# EAGLE board JLC_PCB_7_19 (EAGLE 9.6.2)
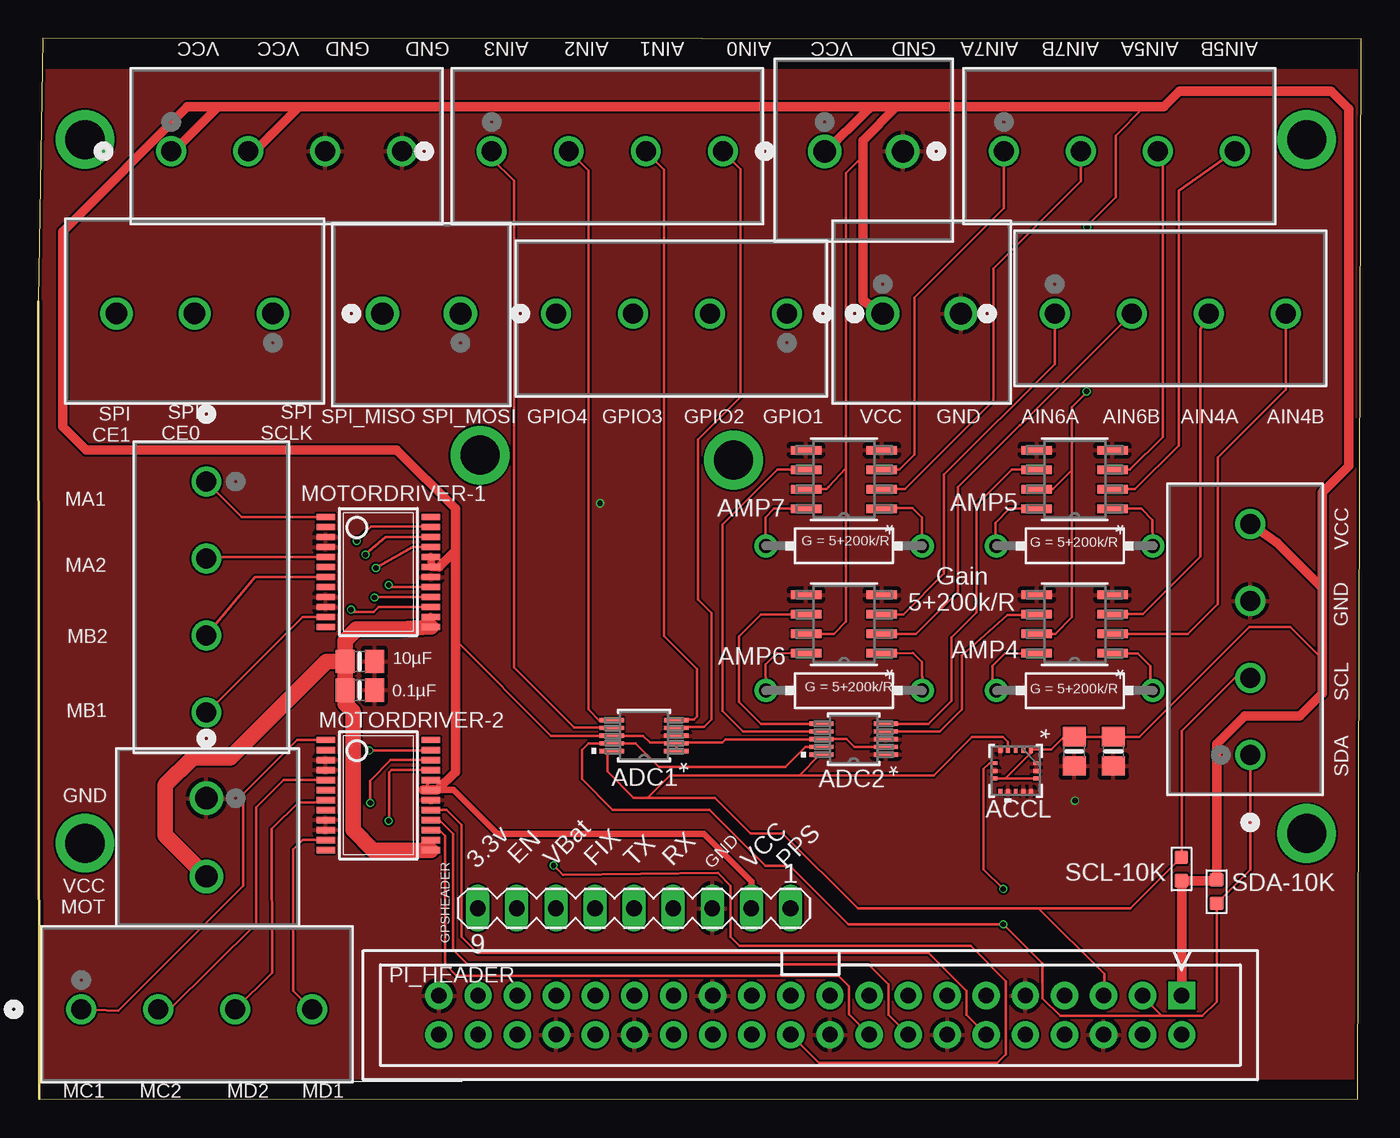
[diagram p0: board, top side]
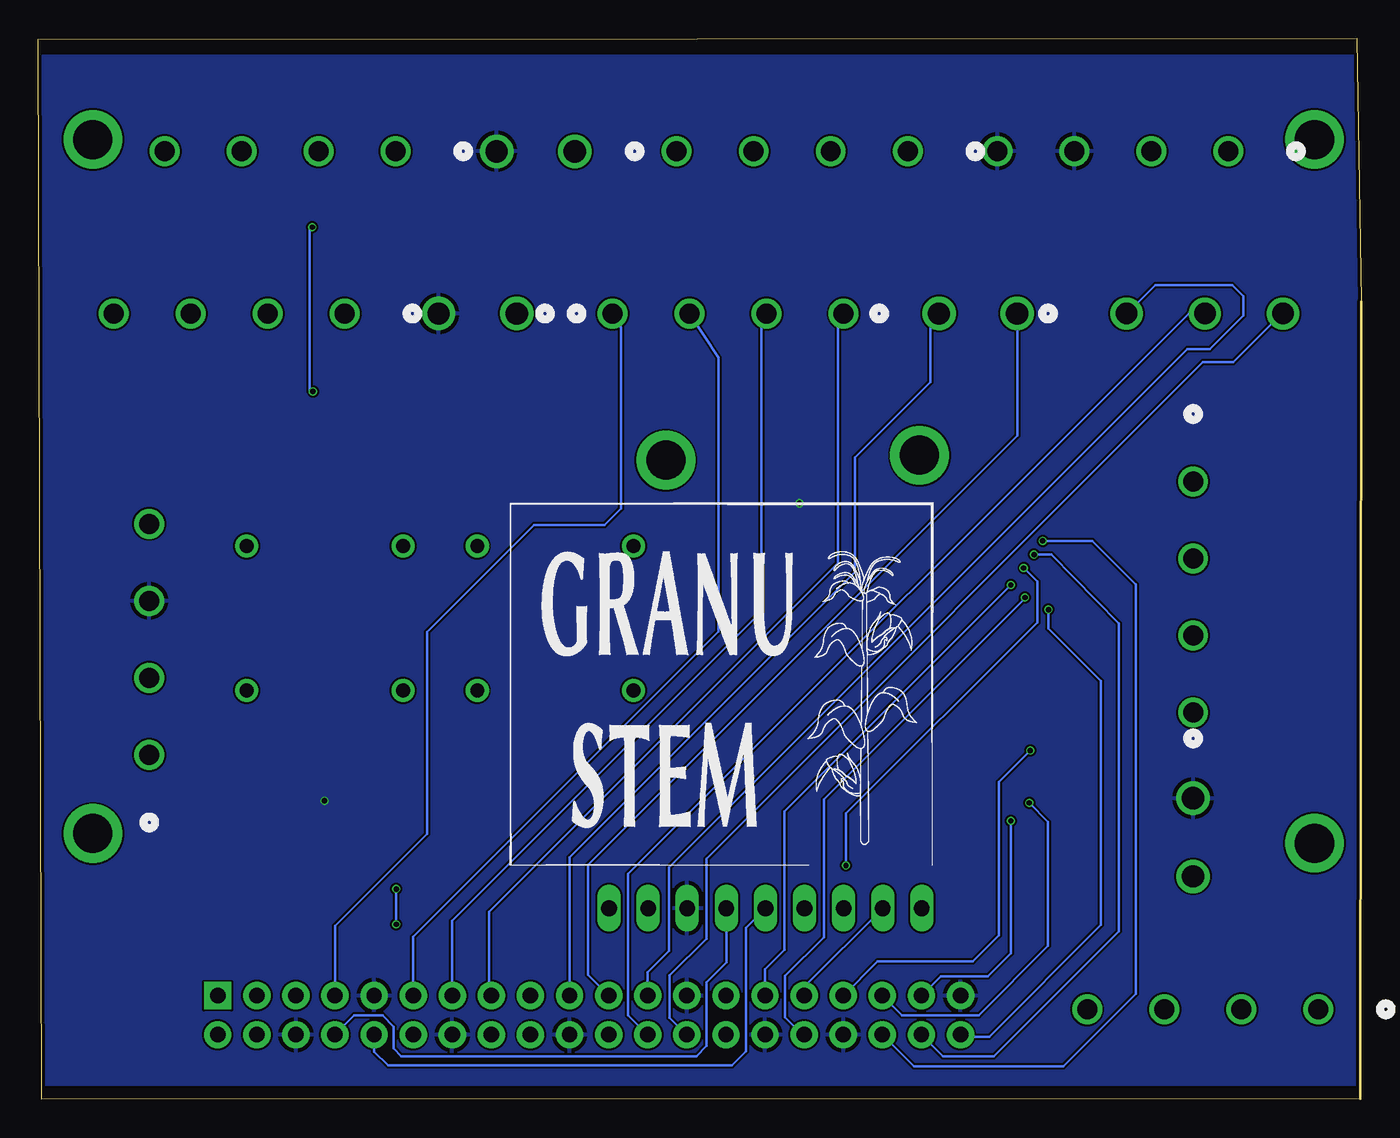
[diagram p1: board, bottom side, seen from below]

Size 85.93 x 68.94 mm. Coordinates in mm from the lower left corner, seen from the top.
Outline: 0.05,0.04 85.73,0 85.93,68.87 0.27,68.94 0,51.84 0.05,0.04
Copper layers (1*16): Top 0.035559375mm / dielectric 1.6mm / Bottom 0.035559375mm
Design rules "JCLPCB DRC": minimum track width 5mil, minimum drill 12mil, track to track 5mil, track to pad 5mil, pad to pad 5mil, via to via 5mil, smd to smd 5mil, copper to edge 8mil, drill to drill 6mil, minimum pad ring 5mil, minimum via ring 3mil, stop-mask expansion 2.5mil, vias tented up to drill 0mil, thermal gap 10mil

## Footprints (pad centres in the part's own frame; a part is rotated, then mirrored left to right if it is on the bottom)
LGA-16_3X3X1MM = smd 0.356 x 0.254: 1 -1.346,1; 2 -1.346,0.5; 3 -1.346,0; 4 -1.346,-0.5; 5 -1.346,-1; 9 1.346,-1; 10 1.346,-0.5; 11 1.346,0; 12 1.346,0.5; 13 1.346,1 | smd 0.254 x 0.356: 6 -0.5,-1.346; 7 0,-1.346; 8 0.5,-1.346; 14 0.5,1.346; 15 0,1.346; 16 -0.5,1.346
DGS10 = smd 1.575 x 0.279: 1 -2.095,1; 2 -2.095,0.5; 3 -2.095,0; 4 -2.095,-0.5; 5 -2.095,-1; 6 2.095,-1; 7 2.095,-0.5; 8 2.095,0; 9 2.095,0.5; 10 2.095,1
R_8_ADI = smd 1.981 x 0.559: 1 -2.464,1.905; 2 -2.464,0.635; 3 -2.464,-0.635; 4 -2.464,-1.905; 5 2.464,-1.905; 6 2.464,-0.635; 7 2.464,0.635; 8 2.464,1.905
CONN_1715048_PXC = drill 1.295 pad 1.803: 1 0,0; 2 5.004,0; 3 10.008,0; 4 15.011,0
CONN02_1730612_11P34X11P62_PXC = drill 1.448 pad 1.956: 1 0,0; 2 5.08,0
CONN_1730405_PXC = drill 1.397 pad 1.905: 1 0,0; 2 5.08,0; 3 10.16,0
MA09-1 = drill 1.016 long: 1 -10.16,0; 2 -7.62,0; 3 -5.08,0; 4 -2.54,0; 5 0,0; 6 2.54,0; 7 5.08,0; 8 7.62,0; 9 10.16,0
SSOP24 = smd 0.4 x 1.2: 1 -3.575,-3.42; 2 -2.925,-3.42; 3 -2.275,-3.42; 4 -1.625,-3.42; 5 -0.975,-3.42; 6 -0.325,-3.42; 7 0.325,-3.42; 8 0.975,-3.42; 9 1.625,-3.42; 10 2.275,-3.42; 11 2.925,-3.42; 12 3.575,-3.42; 13 3.575,3.42; 14 2.925,3.42; 15 2.275,3.42; 16 1.625,3.42; 17 0.975,3.42; 18 0.325,3.42; 19 -0.325,3.42; 20 -0.975,3.42; 21 -1.625,3.42; 22 -2.275,3.42; 23 -2.925,3.42; 24 -3.575,3.42
RASPI_GPIO_B+_BOX = drill 1 pad 1.778 square: 1 -24.13,-1.27 | drill 1 pad 1.778: 2 -24.13,1.27; 3 -21.59,-1.27; 4 -21.59,1.27; 5 -19.05,-1.27; 6 -19.05,1.27; 7 -16.51,-1.27; 8 -16.51,1.27; 9 -13.97,-1.27; 10 -13.97,1.27; 11 -11.43,-1.27; 12 -11.43,1.27; 13 -8.89,-1.27; 14 -8.89,1.27; 15 -6.35,-1.27; 16 -6.35,1.27; 17 -3.81,-1.27; 18 -3.81,1.27; 19 -1.27,-1.27; 20 -1.27,1.27; 21 1.27,-1.27; 22 1.27,1.27; 23 3.81,-1.27; 24 3.81,1.27; 25 6.35,-1.27; 26 6.35,1.27; 27 8.89,-1.27; 28 8.89,1.27; 29 11.43,-1.27; 30 11.43,1.27; 31 13.97,-1.27; 32 13.97,1.27; 33 16.51,-1.27; 34 16.51,1.27; 35 19.05,-1.27; 36 19.05,1.27; 37 21.59,-1.27; 38 21.59,1.27; 39 24.13,-1.27; 40 24.13,1.27
HPS58 = drill 0.9 pad 1.5: 1 -5.08,0; 2 5.08,0
R0603 = smd 0.889 x 0.889: 1 0,0.762; 2 0,-0.762
0805-NO = smd 1.24 x 1.5: 1 -0.95,0; 2 0.95,0

## Placement (x,y rotation side)
ACCL  LIS3DHTR  [LGA-16_3X3X1MM]  63.49,21.35 270 top
ADC1  ADS1115IDGSR  [DGS10]  39.34,23.63 180 top
ADC2  ADS1115IDGSR  [DGS10]  52.97,23.41 180 top
ADC2_AIN4_AMP  AD627ARZ-R7  [R_8_ADI]  67.32,30.89 180 top
ADC2_AIN5_AMP  AD627ARZ-R7  [R_8_ADI]  67.32,40.28 180 top
ADC2_AIN6_AMP  AD627ARZ-R7  [R_8_ADI]  52.34,30.89 180 top
ADC2_AIN7_AMP  AD627ARZ-R7  [R_8_ADI]  52.34,40.28 180 top
ADC_1A_PWR  1715048  [CONN_1715048_PXC]  8.62,61.61 0 top
ADC_1A_SIG  1715048  [CONN_1715048_PXC]  29.45,61.61 0 top
ADC_2A_PWR  1730612  [CONN02_1730612_11P34X11P62_PXC]  51.08,61.61 0 top
ADC_2A_SIG  1715048  [CONN_1715048_PXC]  62.73,61.61 0 top
ADC_2B_PWR  1730612  [CONN02_1730612_11P34X11P62_PXC]  54.85,51.07 0 top
ADC_2B_SIG  1715048  [CONN_1715048_PXC]  66.03,51.07 0 top
GPIO_A_  1715048  [CONN_1715048_PXC]  48.63,51.07 180 top
GPIO_SPIA1  1730612  [CONN02_1730612_11P34X11P62_PXC]  27.42,51.07 180 top
GPIO_SPIA2  1730405  [CONN_1730405_PXC]  15.23,51.07 180 top
GPSHEADER  [MA09-1]  38.7,12.42 180 top
I2CA_  1715048  [CONN_1715048_PXC]  78.73,22.39 90 top
MOTOR_1_A  1715048  [CONN_1715048_PXC]  10.91,40.14 270 top
MOTOR_1_B  1730612  [CONN02_1730612_11P34X11P62_PXC]  10.91,19.57 270 top
MOTOR_2_  1715048  [CONN_1715048_PXC]  2.78,5.85 0 top
MOTORDRIVER-1  TB6612 SSOP  [SSOP24]  22.09,34.28 270 top
MOTORDRIVER-2  TB6612 SSOP  [SSOP24]  22.09,19.77 270 top
PI_HEADER  RASPI_GPIO_B+#_BOX  [RASPI_GPIO_B+_BOX]  50.15,5.47 180 top
R5  [HPS58]  52.34,26.57 180 top
R6  [HPS58]  52.34,35.97 180 top
R7  [HPS58]  67.32,26.57 180 top
R8  [HPS58]  67.32,35.97 180 top
SCL-10K  10K 1/10W  [R0603]  74.26,14.97 0 top
SDA-10K  10K 1/10W  [R0603]  76.54,13.5 180 top
VCC_10UF  10µF  [0805-NO]  69.84,22.62 270 top
VCC_.1UF  0.1µF  [0805-NO]  67.3,22.62 270 top
VMOTOR_10UF  10µF  [0805-NO]  20.88,28.46 0 top
VMOTOR_.1UF  0.1µF  [0805-NO]  20.88,26.59 0 top

## Library data of the parts
ACCL = Capstone; MANUFACTURER_PART_NUMBER: LIS3DHTR; VENDOR: STMicroelectronics
ADC1 ADC2 = Capstone; MANUFACTURER_PART_NUMBER: ADS1115IDGSR; VENDOR: Texas Instruments
ADC2_AIN4_AMP ADC2_AIN5_AMP ADC2_AIN6_AMP ADC2_AIN7_AMP = Amplifier; COPYRIGHT: Copyright (C) 2023 Ultra Librarian. All rights reserved.; DIGIKEY_PART_NUMBER_1: AD627ARZ-R7CT-ND; DIGIKEY_PART_NUMBER_2: AD627ARZ-R7DKR-ND; DIGIKEY_PART_NUMBER_3: AD627ARZ-R7TR-ND; MANUFACTURER_PART_NUMBER: AD627ARZ-R7; MFR_NAME: Analog Devices Inc
ADC_1A_PWR ADC_1A_SIG ADC_2A_SIG ADC_2B_SIG GPIO_A_ I2CA_ MOTOR_1_A MOTOR_2_ = ScrewTerminals; COPYRIGHT: Copyright (C) 2023 Ultra Librarian. All rights reserved.; MANUFACTURER_PART_NUMBER: 1715048; MFR_NAME: Phoenix Contact
ADC_2A_PWR ADC_2B_PWR GPIO_SPIA1 MOTOR_1_B = ScrewTerminals; COPYRIGHT: Copyright (C) 2023 Ultra Librarian. All rights reserved.; MANUFACTURER_PART_NUMBER: 1730612; MFR_NAME: Phoenix Contact
GPIO_SPIA2 = ScrewTerminals; COPYRIGHT: Copyright (C) 2023 Ultra Librarian. All rights reserved.; MANUFACTURER_PART_NUMBER: 1730405; MFR_NAME: Phoenix Contact
GPSHEADER = con-lstb; OC_FARNELL: unknown; OC_NEWARK: unknown
MOTORDRIVER-1 MOTORDRIVER-2 VCC_10UF VCC_.1UF VMOTOR_10UF VMOTOR_.1UF = microbuilder
PI_HEADER = raspberrypi_bastelstube_v13
R5-R8 = resistor-power; OC_FARNELL: unknown; OC_NEWARK: unknown
SCL-10K SDA-10K = Seeed-Resistor; MPN: RC0603JR-0710KL

## Nets
3V3B: PI_HEADER.17
5V0A: PI_HEADER.2
5V0B: PI_HEADER.4
ADC1_AIN0: ADC1.4 ADC_1A_SIG.4
ADC1_AIN1: ADC1.5 ADC_1A_SIG.3
ADC1_AIN2: ADC1.6 ADC_1A_SIG.2
ADC1_AIN3: ADC1.7 ADC_1A_SIG.1
ADC2_AIN4: ADC2.4 ADC2_AIN4_AMP.6
ADC2_AIN4A: ADC2_AIN4_AMP.3 ADC_2B_SIG.3
ADC2_AIN4B: ADC2_AIN4_AMP.2 ADC_2B_SIG.4
ADC2_AIN5: ADC2.5 ADC2_AIN5_AMP.6
ADC2_AIN5A: ADC2_AIN5_AMP.3 ADC_2A_SIG.3
ADC2_AIN5B: ADC2_AIN5_AMP.2 ADC_2A_SIG.4
ADC2_AIN6: ADC2.6 ADC2_AIN6_AMP.6
ADC2_AIN6A: ADC2_AIN6_AMP.3 ADC_2B_SIG.1
ADC2_AIN6B: ADC2_AIN6_AMP.2 ADC_2B_SIG.2
ADC2_AIN7: ADC2.7 ADC2_AIN7_AMP.6
ADC2_AIN7A: ADC2_AIN7_AMP.3 ADC_2A_SIG.1
ADC2_AIN7B: ADC2_AIN7_AMP.2 ADC_2A_SIG.2
ADC_1: GPIO_SPIA1.1 PI_HEADER.19
AIN1: MOTORDRIVER-1.21 PI_HEADER.22
AIN2: MOTORDRIVER-1.22 PI_HEADER.38
BIN1: MOTORDRIVER-1.17 PI_HEADER.29
BIN2: MOTORDRIVER-1.16 PI_HEADER.32
CIN1: MOTORDRIVER-2.21 PI_HEADER.37
CIN2: MOTORDRIVER-2.22 PI_HEADER.35
DIN1: MOTORDRIVER-2.17 PI_HEADER.12
DIN2: MOTORDRIVER-2.16 PI_HEADER.16
EN: GPSHEADER.8 PI_HEADER.31
FIX: GPSHEADER.6
GND: ACCL.5 ACCL.7 ACCL.10 ACCL.12 ACCL.13 ACCL.15 ACCL.16 ADC1.3 ADC2.1 ADC2.3 ADC2_AIN4_AMP.4 ADC2_AIN4_AMP.5 ADC2_AIN5_AMP.4 ADC2_AIN5_AMP.5 ADC2_AIN6_AMP.4 ADC2_AIN6_AMP.5 ADC2_AIN7_AMP.4 ADC2_AIN7_AMP.5 ADC_1A_PWR.3 ADC_1A_PWR.4 ADC_2A_PWR.2 ADC_2B_PWR.2 GPSHEADER.3 I2CA_.3 MOTOR_1_B.1 MOTORDRIVER-1.3 MOTORDRIVER-1.4 MOTORDRIVER-1.9 MOTORDRIVER-1.10 MOTORDRIVER-1.18 MOTORDRIVER-2.3 MOTORDRIVER-2.4 MOTORDRIVER-2.9 MOTORDRIVER-2.10 MOTORDRIVER-2.18 PI_HEADER.6 PI_HEADER.9 PI_HEADER.14 PI_HEADER.20 PI_HEADER.25 PI_HEADER.30 PI_HEADER.34 PI_HEADER.39 VCC_10UF.2 VCC_.1UF.2 VMOTOR_10UF.2 VMOTOR_.1UF.2
GPIO1: GPIO_A_.1 PI_HEADER.7
GPIO2: GPIO_A_.2 PI_HEADER.11
GPIO3: GPIO_A_.3 PI_HEADER.13
GPIO4: GPIO_A_.4 PI_HEADER.15
M1_MV: MOTORDRIVER-1.24
M2_MV: MOTORDRIVER-2.24
MA1: MOTOR_1_A.1 MOTORDRIVER-1.1
MA2: MOTOR_1_A.2 MOTORDRIVER-1.5
MB1: MOTOR_1_A.4 MOTORDRIVER-1.11
MB2: MOTOR_1_A.3 MOTORDRIVER-1.7
MC1: MOTOR_2_.1 MOTORDRIVER-2.1
MC2: MOTOR_2_.2 MOTORDRIVER-2.5
MD1: MOTOR_2_.4 MOTORDRIVER-2.11
MD2: MOTOR_2_.3 MOTORDRIVER-2.7
N$15: ADC2_AIN6_AMP.1 R5.1
N$16: ADC2_AIN6_AMP.8 R5.2
N$17: ADC2_AIN4_AMP.1 R7.1
N$18: ADC2_AIN4_AMP.8 R7.2
N$19: ADC2_AIN5_AMP.1 R8.1
N$20: ADC2_AIN5_AMP.8 R8.2
N$21: ADC2_AIN7_AMP.1 R6.1
N$22: ADC2_AIN7_AMP.8 R6.2
PWMA: MOTORDRIVER-1.23 PI_HEADER.36
PWMB: MOTORDRIVER-1.15 PI_HEADER.40
PWMC: MOTORDRIVER-2.23 PI_HEADER.33
PWMD: MOTORDRIVER-2.15 PI_HEADER.18
RX: GPSHEADER.4 PI_HEADER.8
SCL: ACCL.4 ADC1.10 ADC2.10 I2CA_.2 PI_HEADER.5 SCL-10K.1
SDA: ACCL.6 ADC1.9 ADC2.9 I2CA_.1 PI_HEADER.3 SDA-10K.1
SPI_CE0: GPIO_SPIA2.2 PI_HEADER.24
SPI_CE1: GPIO_SPIA2.3 PI_HEADER.26
SPI_MISO: GPIO_SPIA1.2 PI_HEADER.21
SPI_SCLK: GPIO_SPIA2.1 PI_HEADER.23
TX: GPSHEADER.5 PI_HEADER.10
VCC: ACCL.1 ACCL.8 ACCL.14 ADC1.1 ADC1.2 ADC1.8 ADC2.2 ADC2.8 ADC2_AIN4_AMP.7 ADC2_AIN5_AMP.7 ADC2_AIN6_AMP.7 ADC2_AIN7_AMP.7 ADC_1A_PWR.1 ADC_1A_PWR.2 ADC_2A_PWR.1 ADC_2B_PWR.1 GPSHEADER.2 I2CA_.4 MOTORDRIVER-1.19 MOTORDRIVER-1.20 MOTORDRIVER-2.19 MOTORDRIVER-2.20 PI_HEADER.1 SCL-10K.2 SDA-10K.2 VCC_10UF.1 VCC_.1UF.1
VMOTOR: MOTOR_1_B.2 MOTORDRIVER-1.13 MOTORDRIVER-1.14 MOTORDRIVER-2.13 MOTORDRIVER-2.14 VMOTOR_10UF.1 VMOTOR_.1UF.1

## Tracks (layer width: path | path; a pad name or v marks a point on that pad's centre or on a via)
ADC1_AIN0
  Top 0.152: ADC1.4 41.5,24.19 43.24,24.19 43.73,24.69 43.73,31.62 42.85,32.5 42.85,42.86 45.61,45.62 45.61,60.46 ADC_1A_SIG.4
ADC1_AIN1
  Top 0.152: ADC1.5 41.5,24.7 42.59,24.7 42.78,24.89 42.78,27.98 40.65,30.1 40.65,60.41 ADC_1A_SIG.3
ADC1_AIN2
  Top 0.152: ADC1.6 36.44,24.63 35.73,25.35 35.73,60.34 ADC_1A_SIG.2
ADC1_AIN3
  Top 0.152: ADC1.7 37.21,24.18 34.79,24.18 30.9,28.07 30.9,59.69 29.45,61.14 ADC_1A_SIG.1
ADC2_AIN4
  Top 0.152: ADC2.4 55.08,23.92 58.55,23.92 59.98,25.35 59.98,28.83 62.95,31.48 64.27,31.48 ADC2_AIN4_AMP.6
ADC2_AIN4A
  Top 0.152: ADC2_AIN4_AMP.3 69.85,31.53 71.76,31.53 75.5,35.28 75.5,50.05 ADC_2B_SIG.3
ADC2_AIN4B
  Top 0.152: ADC2_AIN4_AMP.2 74.69,30.25 76.62,32.18 76.62,41.72 81.04,46.14 ADC_2B_SIG.4
ADC2_AIN5
  Top 0.152: ADC2.5 57.83,24.41 59.31,25.88 59.31,30.02 60.93,31.65 60.93,38.62 63.26,40.94 64.83,40.94 ADC2_AIN5_AMP.6
ADC2_AIN5A
  Top 0.152: ADC2_AIN5_AMP.3 70.9,40.92 73.04,43.05 73.04,61.3 ADC_2A_SIG.3
ADC2_AIN5B
  Top 0.152: ADC2_AIN5_AMP.2 71.25,39.65 74.08,42.48 74.08,59.04 ADC_2A_SIG.4
ADC2_AIN6
  Top 0.152: ADC2_AIN6_AMP.6 46.95,31.52 45.52,30.09 45.52,25.83 46.94,24.41 ADC2.6
ADC2_AIN6A
  Top 0.152: ADC_2B_SIG.1 66.03,47.79 58.83,40.59 58.83,34.16 56.18,31.52 ADC2_AIN6_AMP.3
ADC2_AIN6B
  Top 0.152: ADC_2B_SIG.2 63.79,43.83 63.77,43.83 59.73,39.79 59.73,32.97 57.01,30.25 ADC2_AIN6_AMP.2
ADC2_AIN7
  Top 0.152: ADC2.7 45.78,23.91 44.44,25.25 44.44,37.35 48.01,40.92 ADC2_AIN7_AMP.6
ADC2_AIN7A
  Top 0.152: ADC_2A_SIG.1 62.73,57.91 56.91,52.1 56.91,41.9 55.93,40.92 ADC2_AIN7_AMP.3
ADC2_AIN7B
  Top 0.152: ADC_2A_SIG.2 67.73,59.68 62.04,53.99 62.04,45.4 56.29,39.65 ADC2_AIN7_AMP.2
ADC_1
  Bottom 0.152: PI_HEADER.19 51.42,15.73 32.87,34.28 32.87,41.72 27.97,46.62 27.97,50.54 27.95,50.54 GPIO_SPIA1.1
AIN1  (via drill 0.35)
  Top 0.152: MOTORDRIVER-1.21 24.31,35.9 v21.92,34.53 | PI_HEADER.22 50.71,2.37 62.29,2.37 62.87,2.95 62.87,7.67 60.57,9.97 45.56,9.97 44.97,10.56 44.97,13.88 44.14,14.71 34.09,14.58 v33.46,15.2
  Bottom 0.152: v33.46,15.2 33.45,15.21 33.45,18.58 21.03,31 21.03,33.64 v21.92,34.53
AIN2  (via drill 0.35)
  Top 0.152: MOTORDRIVER-1.22 22.57,36.55 21.26,35.45 v21.25,35.39
  Bottom 0.152: v21.25,35.39 20.11,35.39 15.74,30.93 15.74,10.92 23.84,2.82 27.18,2.82 PI_HEADER.38
BIN1  (via drill 0.35)
  Top 0.152: MOTORDRIVER-1.17 22.84,33.3 v22.75,33.43
  Bottom 0.152: PI_HEADER.29 38.72,8.46 37.45,9.73 37.45,18.72 v22.75,33.43
BIN2  (via drill 0.35)
  Top 0.152: MOTORDRIVER-1.16 22.06,32.65 22.02,32.61 v21.83,32.61
  Bottom 0.152: PI_HEADER.32 36.29,4.2 37.41,5.33 37.41,8.03 34.9,10.55 34.9,19.49 21.83,32.56 v21.83,32.61
CIN1  (via drill 0.35)
  Top 0.152: MOTORDRIVER-2.21 22.94,21.4 22.78,21.24 22.78,18.14 v22.75,18.1
  Bottom 0.152: v22.75,18.1 22.75,9.49 24.24,8 27.31,8 PI_HEADER.37
CIN2  (via drill 0.35)
  Top 0.152: MOTORDRIVER-2.22 22.89,22.05 21.55,20.71 v21.55,19.27
  Bottom 0.152: PI_HEADER.35 29.83,5.47 24.83,5.47 20.33,9.97 20.33,18.05 v21.55,19.27
DIN1
  Top 0.152: MOTORDRIVER-2.17 26.53,18.8 27.48,17.85 27.48,10.58 28.52,9.54 57.83,9.54 60.3,7.07 60.3,5.49 PI_HEADER.12
DIN2
  Top 0.152: MOTORDRIVER-2.16 26.02,18.15 26.93,17.24 26.93,9.71 27.86,8.78 53.91,8.78 55.21,7.47 55.21,5.49 PI_HEADER.16
EN
  Bottom 0.152: PI_HEADER.31 36.18,7.32 GPSHEADER.8
GND  (via drill 0.35)
  other vias: 36.49,38.73 67.35,19.41
  pour Top: 0.28,66.87 85.67,66.87 85.67,1.36 0.28,1.36
  pour Bottom: 0.17,67.81 85.65,67.81 85.65,0.94 0.17,0.94
GPIO1
  Bottom 0.152: PI_HEADER.7 66.66,11.26 60.68,17.25 60.68,30.38 53.75,37.31 49.16,37.31 48.08,38.4 48.08,50.14 GPIO_A_.1
GPIO2
  Bottom 0.152: PI_HEADER.11 61.58,10.55 41.73,30.4 41.73,48.22 GPIO_A_.2
GPIO3
  Bottom 0.152: PI_HEADER.13 59.06,6.76 59.06,11.59 38.94,31.71 38.94,50.75 GPIO_A_.3
GPIO4
  Bottom 0.152: PI_HEADER.15 56.64,6.88 56.64,12.19 33.99,34.85 33.99,50.71 33.95,50.74 GPIO_A_.4
MA1
  Top 0.152: MOTOR_1_A.1 13.21,37.84 17.83,37.84 17.84,37.85 MOTORDRIVER-1.1
MA2
  Top 0.152: MOTOR_1_A.2 10.37,35.25 MOTORDRIVER-1.5
MB1
  Top 0.152: MOTORDRIVER-1.11 17.17,31.35 10.95,25.13 MOTOR_1_A.4
MB2
  Top 0.152: MOTOR_1_A.3 14.08,33.95 MOTORDRIVER-1.7
MC1
  Top 0.152: MOTORDRIVER-2.1 16.81,23.35 13.31,19.85 13.31,13.88 5.18,5.75 2.79,5.84 MOTOR_2_.1
MC2
  Top 0.152: MOTORDRIVER-2.5 15.93,20.75 14.15,18.96 14.15,11.42 8.54,5.85 MOTOR_2_.2
MD1
  Top 0.152: MOTORDRIVER-2.11 17.15,16.85 16.56,16.26 16.56,7.06 MOTOR_2_.4
MD2
  Top 0.152: MOTORDRIVER-2.7 17.97,19.3 16.89,19.3 15.16,17.57 15.17,8.24 MOTOR_2_.3
N$1  (via drill 2.54 pad 3.81)
  other vias: 3.02,62.37
N$2  (via drill 2.54 pad 3.81)
  other vias: 3.02,16.65
N$3  (via drill 2.54 pad 3.81)
  other vias: 82.4,17.28
N$4  (via drill 2.54 pad 3.81)
  other vias: 82.4,62.37
N$5  (via drill 2.54 pad 3.81)
  other vias: 28.69,41.86
N$6  (via drill 2.54 pad 3.81)
  other vias: 45.16,41.54
N$15
  Top 0.152: ADC2_AIN6_AMP.1 56.82,29.01 57.39,28.44 R5.1
N$16
  Top 0.152: ADC2_AIN6_AMP.8 47.97,29.01 47.23,28.27 R5.2
N$17
  Top 0.152: R7.1 72.25,26.24 72.25,28.17 71.44,28.98 ADC2_AIN4_AMP.1
N$18
  Top 0.152: R7.2 61.98,26.35 61.98,28.18 62.78,28.98 ADC2_AIN4_AMP.8
N$19
  Top 0.152: R8.1 72.38,37.66 71.67,38.38 ADC2_AIN5_AMP.1
N$20
  Top 0.152: R8.2 62.18,36.06 62.18,37.46 63.09,38.38 ADC2_AIN5_AMP.8
N$21
  Top 0.152: R6.1 57.39,35.99 57.39,37.82 56.79,38.42 54.84,38.42 ADC2_AIN7_AMP.1
N$22
  Top 0.152: ADC2_AIN7_AMP.8 47.8,38.38 47.23,37.81 47.23,35.99 R6.2
PWMA  (via drill 0.35)
  Top 0.152: MOTORDRIVER-1.23 25.48,37.23 21.61,37.23 v20.68,36.3
  Bottom 0.152: v20.68,36.3 20.66,36.28 17.45,36.28 14.63,33.45 14.63,6.86 19.33,2.16 29.06,2.16 PI_HEADER.36
PWMB  (via drill 0.35)
  Top 0.152: MOTORDRIVER-1.15 22.1,32 21.77,31.67 20.46,31.67 v20.31,31.83
  Bottom 0.152: v20.31,31.83 20.31,30.61 16.9,27.2 16.9,11.33 24.16,4.08 25.9,4.08 PI_HEADER.40
PWMC  (via drill 0.35)
  Top 0.152: MOTORDRIVER-2.23 24.93,22.67 v21.49,22.67
  Bottom 0.152: v21.49,22.67 23.52,20.64 23.52,10.67 25.22,8.98 31.41,8.98 PI_HEADER.33
PWMD
  Top 0.152: MOTORDRIVER-2.15 26.04,17.5 26.42,17.12 26.42,8.8 27.18,8.04 51.97,8.04 52.65,7.36 52.65,5.52 PI_HEADER.18
RX
  Bottom 0.152: GPSHEADER.4 41.24,8.91 42.52,7.63 42.52,3.48 43.18,2.82 62.36,2.82 62.85,3.31 62.85,4.73 63.58,5.46 65.41,5.46 PI_HEADER.8
SCL
  Top 0.152: 64.98,12.41 69.24,8.15 69.24,6.78 PI_HEADER.5 | ADC2.10 50.78,22.41 49.44,21.07 | 64.98,12.41 70.94,12.41 SCL-10K.1 74.28,15.76 74.28,23.95 77.73,27.4 78.68,27.4 78.68,27.39 I2CA_.2 | 64.98,12.41 53.23,12.41 48.35,17.3 46.27,17.3 43.97,19.6 39.6,19.6 | ADC1.10 37.22,22.63 36.97,22.38 36.97,21.3 38.68,19.6 39.6,19.6 | 39.6,19.6 39.6,19.62 41.05,21.07 49.44,21.07 | ACCL.4 62.97,22.71 62.97,23.22 62.65,23.55 60.64,23.55 58.16,21.07 49.44,21.07
SDA  (via drill 0.35)
  Top 0.152: 72.97,5.42 71.74,6.65 PI_HEADER.3 | 72.97,5.42 75.63,5.42 76.54,6.34 SDA-10K.1 78.73,14.92 I2CA_.1 | ADC2.9 49.82,22.91 48.53,21.61 40.31,21.61 38.79,23.13 ADC1.9 35.73,23.13 35.31,22.72 35.31,20.82 37.29,18.83 43.61,18.83 47.25,15.19 48.82,15.19 52.63,11.38 v62.69,11.38 65.24,8.83 65.24,6.59 66.4,5.42 72.97,5.42 | ACCL.6 61.79,21.85 61.41,21.47 61.41,14.96 v62.69,13.68
  Bottom 0.152: v62.69,11.38 v62.69,13.68
SPI_CE0
  Bottom 0.152: PI_HEADER.24 46.37,4.2 47.63,5.46 47.63,14.64 11.2,51.07 GPIO_SPIA2.2
SPI_CE1
  Bottom 0.152: PI_HEADER.26 44.92,5.32 44.92,8.06 42.53,10.44 42.53,15.63 10.27,47.9 8.31,47.9 5.14,51.07 GPIO_SPIA2.3
SPI_MISO
  Bottom 0.152: PI_HEADER.21 48.88,6.75 50.23,8.1 50.23,15.25 22.34,43.14 GPIO_SPIA1.2
SPI_SCLK
  Bottom 0.152: PI_HEADER.23 46.34,8.27 44.95,9.66 44.95,15.07 11.28,48.74 9.83,48.74 7.65,50.93 7.65,52.2 8.37,52.92 13.37,52.92 GPIO_SPIA2.1
TX
  Bottom 0.152: GPSHEADER.5 39.95,11.16 39.95,3.12 40.87,2.21 63.22,2.21 64.12,3.11 PI_HEADER.10
VCC  (via drill 0.35)
  Top 0.152: MOTORDRIVER-2.19 25,20.11 MOTORDRIVER-2.20 | ADC1.1 ADC1.2 | ADC1.2 41.5,23.2 44.44,23.2 44.65,23.41 ADC2.8 52.5,23.41 53,22.91 ADC2.2 | ADC1.2 41.38,23.19 39.73,23.19 39.28,23.63 ADC1.8 33.32,23.63 27.09,29.86 | ACCL.14 ACCL.8 62.82,20.85 64.49,22.52 ACCL.1 64.53,22.73 65.81,22.73 66.66,23.58 67.28,23.58 VCC_.1UF.1 VCC_10UF.1 71.52,23.57 78.66,30.71 81.32,30.71 83.4,28.63 83.4,27.24 | 52.48,41.03 52.48,31.05 51.68,30.25 ADC2_AIN6_AMP.7 | 52.48,41.03 51.32,39.78 51.19,39.65 ADC2_AIN7_AMP.7 | 71.84,64.49 69.99,62.64 69.99,58.62 68.14,56.77 v68.14,56.68 | 67.15,40.9 67.15,44.98 68.1,45.92 v68.1,46 | 67.15,40.9 65.9,39.65 ADC2_AIN5_AMP.7 | 67.15,40.9 67.15,31.33 66.07,30.25 ADC2_AIN4_AMP.7 | 53.56,61.28 52.48,60.2 52.48,41.03
  Top 0.406: MOTORDRIVER-2.19 26.98,20.1 29.83,17.25 43.23,17.25 46.32,14.16 GPSHEADER.2
  Top 0.508: MOTORDRIVER-1.20 MOTORDRIVER-1.19 25.51,34.61 26.03,34.61
  Top 0.61: 55.74,64.49 71.84,64.49 73.1,64.49 74.13,65.52 84,65.52 85.14,64.38 85.14,41.16 83.4,39.42 83.4,33.24 | 11.68,64.49 9.66,64.49 1.57,56.4 1.57,43.73 3.1,42.2 23.28,42.2 27.09,38.38 27.09,35.67 | 55.74,64.49 53.56,62.31 53.56,61.28 53.56,51.89 ADC_2B_PWR.1 | PI_HEADER.1 74.28,14.19 SCL-10K.2 76.49,14.21 SDA-10K.2 76.54,23.1 78.37,24.93 81.97,24.93 83.4,26.37 83.4,27.24 83.4,33.24 | 11.68,64.49 16.93,64.49 | 16.93,64.49 53.91,64.49 | 53.91,64.49 55.74,64.49 | 53.91,64.49 53.91,64.35 51.08,61.52 ADC_2A_PWR.1 | I2CA_.4 80.44,36.19 83.4,33.24 | 11.68,64.49 8.76,61.57 ADC_1A_PWR.1 | 16.93,64.49 14.01,61.57 ADC_1A_PWR.2 | 25,20.11 25.91,20.11 27.09,21.29 27.09,29.86 27.09,35.67 | 27.09,35.67 26.03,34.61
  Bottom 0.152: v68.14,56.68 68.3,56.51 68.3,46 v68.1,46
VMOTOR
  Top 0.254: MOTORDRIVER-2.14 MOTORDRIVER-2.13
  Top 0.508: MOTORDRIVER-1.13 MOTORDRIVER-1.14
  Top 1.016: VMOTOR_10UF.1 VMOTOR_.1UF.1 19.93,25.7 20.44,25.2 20.44,17.51 21.75,16.2 MOTORDRIVER-2.13 | VMOTOR_10UF.1 18.72,28.46 12.46,22.2 10.02,22.2 8.25,20.43 8.25,17.15 MOTOR_1_B.2 | MOTORDRIVER-1.13 23.44,30.58 20.68,30.58 19.93,29.83 VMOTOR_10UF.1

## Text on the board
tPlace: VCC | VCC | GND | GND | AIN3 | AIN2 | AIN1 | AIN0 | VCC | GND | AIN7A | AIN7B | AIN5A | AIN5B | SPI / CE1 | SPI / CE0 | SPI / SCLK | SPI_MISO | SPI_MOSI | GPIO4 | GPIO3 | GPIO2 | GPIO1 | VCC | GND | AIN6A | AIN6B | AIN4A | AIN4B | MA1 | AMP7 | AMP5 | VCC | G = 5+200k/R | G = 5+200k/R | MA2 | GND | Gain / 5+200k/R | MB2 | AMP4 | AMP6 | SCL | MB1 | G = 5+200k/R | G = 5+200k/R | SDA | GND | 3.3v | EN | VBat | FIX | TX | RX | GND | VCC | PPS | VCC / MOT | MC1 | MC2 | MD2 | MD1